# EAGLE board kdZDUCCsPW (EAGLE 6.1)
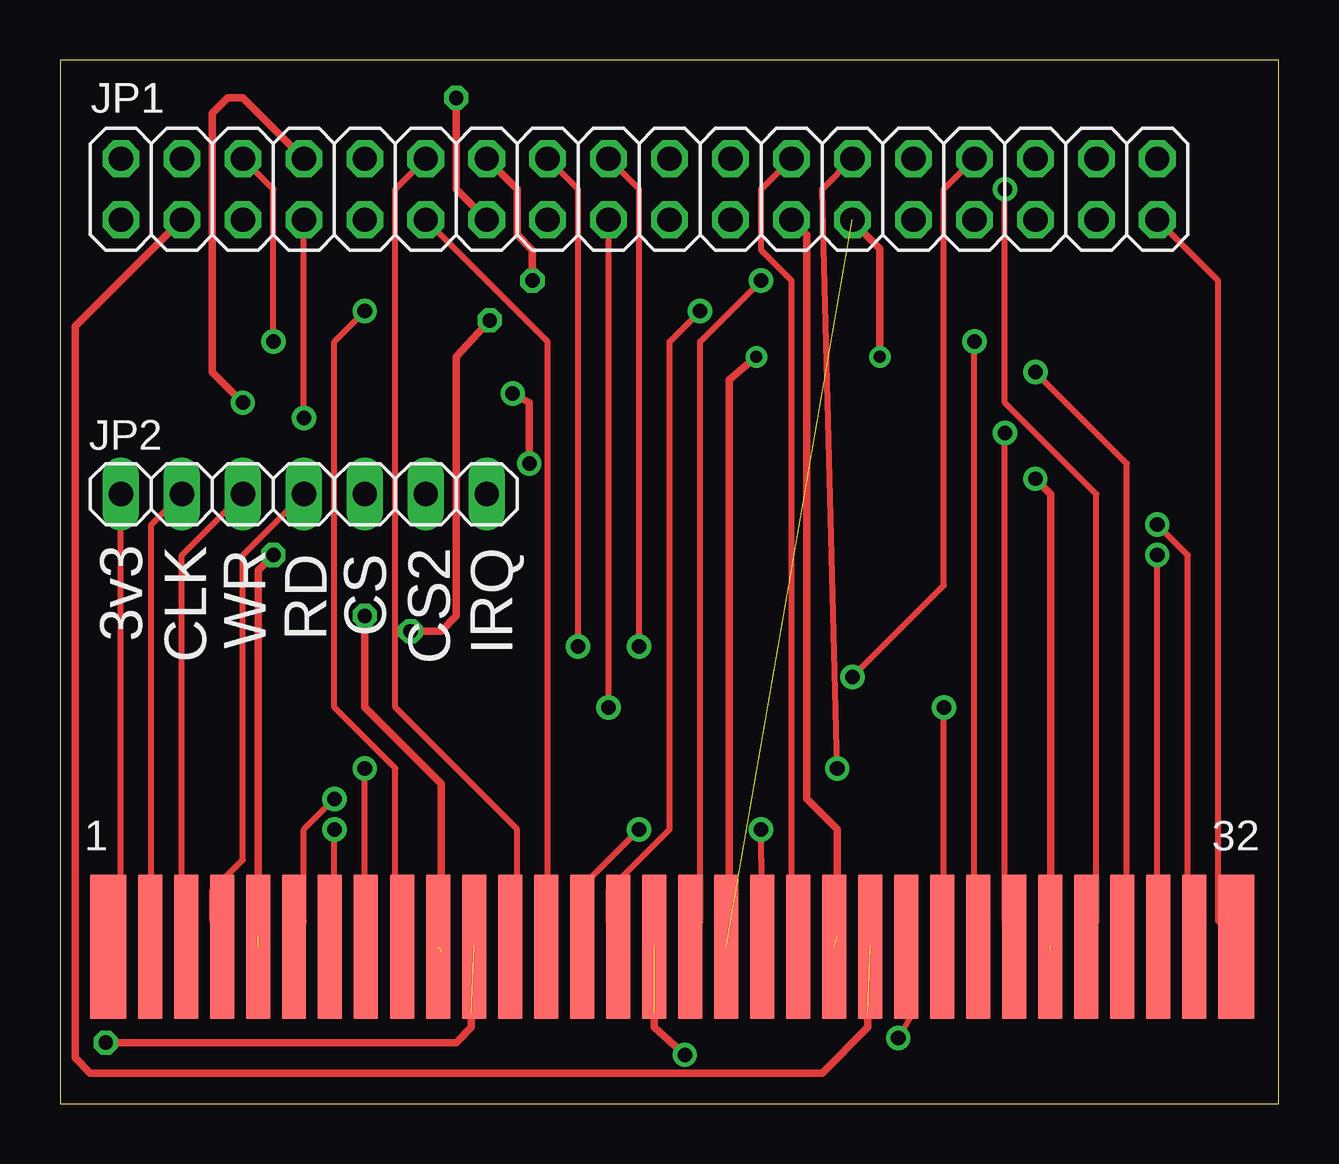
[diagram p0: board, top side]
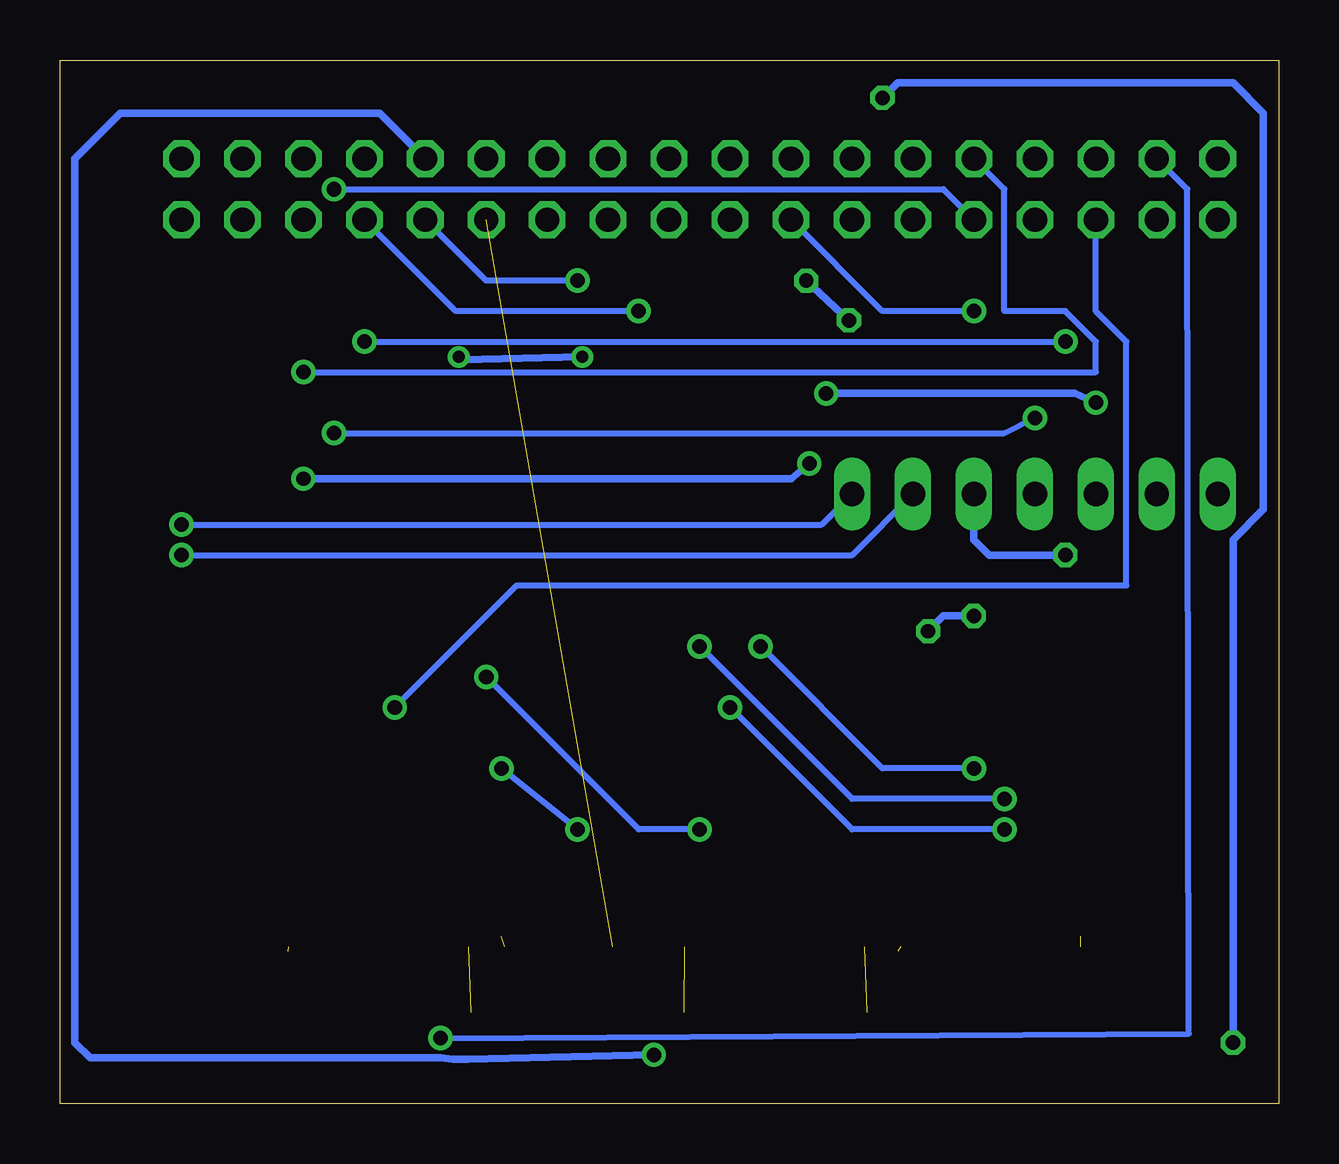
[diagram p1: board, bottom side, seen from below]

Size 50.78 x 43.48 mm. Coordinates in mm from the lower left corner, seen from the top.
Outline: 0,0 50.78,0 50.78,43.48 0,43.48 0,0
Copper layers (1*16): Top 0.035mm / dielectric 1.5mm / Bottom 0.035mm
Design rules: minimum track width 10mil, minimum drill 24mil, track to track 8mil, track to pad 8mil, pad to pad 8mil, via to via 8mil, smd to smd 8mil, copper to edge 40mil, drill to drill 8mil, minimum pad ring 10mil, minimum via ring 8mil, stop-mask expansion 4mil, vias tented up to drill 0mil, thermal gap 10mil

## Footprints (pad centres in the part's own frame; a part is rotated, then mirrored left to right if it is on the bottom)
2X18 = drill 1.016 octagon: 1 -21.59,-1.27; 2 -21.59,1.27; 3 -19.05,-1.27; 4 -19.05,1.27; 5 -16.51,-1.27; 6 -16.51,1.27; 7 -13.97,-1.27; 8 -13.97,1.27; 9 -11.43,-1.27; 10 -11.43,1.27; 11 -8.89,-1.27; 12 -8.89,1.27; 13 -6.35,-1.27; 14 -6.35,1.27; 15 -3.81,-1.27; 16 -3.81,1.27; 17 -1.27,-1.27; 18 -1.27,1.27; 19 1.27,-1.27; 20 1.27,1.27; 21 3.81,-1.27; 22 3.81,1.27; 23 6.35,-1.27; 24 6.35,1.27; 25 8.89,-1.27; 26 8.89,1.27; 27 11.43,-1.27; 28 11.43,1.27; 29 13.97,-1.27; 30 13.97,1.27; 31 16.51,-1.27; 32 16.51,1.27; 33 19.05,-1.27; 34 19.05,1.27; 35 21.59,-1.27; 36 21.59,1.27
1X07 = drill 1.016 long: 1 -7.62,0; 2 -5.08,0; 3 -2.54,0; 4 0,0; 5 2.54,0; 6 5.08,0; 7 7.62,0
GBCART = smd 1.5 x 6: 1 -23.4,-25.21; 32 23.6,-25.21 | smd 1 x 6: 2 -21.65,-25.21; 3 -20.15,-25.21; 4 -18.65,-25.21; 5 -17.15,-25.21; 6 -15.65,-25.21; 7 -14.15,-25.21; 8 -12.65,-25.21; 9 -11.15,-25.21; 10 -9.65,-25.21; 11 -8.15,-25.21; 12 -6.65,-25.21; 13 -5.15,-25.21; 14 -3.65,-25.21; 15 -2.15,-25.21; 16 -0.65,-25.21; 17 0.85,-25.21; 18 2.35,-25.21; 19 3.85,-25.21; 20 5.35,-25.21; 21 6.85,-25.21; 22 8.35,-25.21; 23 9.85,-25.21; 24 11.35,-25.21; 25 12.85,-25.21; 26 14.35,-25.21; 27 15.85,-25.21; 28 17.35,-25.21; 29 18.85,-25.21; 30 20.35,-25.21; 31 21.85,-25.21

## Placement (x,y rotation side)
JP1  [2X18]  24.13,38.1 0 top
JP2  [1X07]  10.16,25.4 0 top
U$1  [GBCART]  25.4,31.75 0 top

## Library data of the parts
JP1 JP2 = pinhead
U$1 = gameboy-nohole-noboard

## Nets
N$1: JP1.18 U$1.6
N$2: JP1.17 U$1.7
N$3: JP1.16 U$1.8
N$4: JP1.15 U$1.9
N$5: JP1.8 U$1.27
N$6: JP1.25 U$1.18
N$7: JP1.12 U$1.12
N$8: JP1.11 U$1.13
N$9: JP1.30 U$1.14
N$10: JP1.29 U$1.15
N$12: JP1.27 U$1.17
N$13: JP1.26 U$1.19
N$14: JP1.24 U$1.20
N$16: JP1.14 U$1.10
N$17: JP1.35 U$1.32
N$18: JP2.1 U$1.1
N$19: JP2.2 U$1.2
N$20: JP2.3 U$1.3
N$21: JP2.4 U$1.4
N$23: JP2.6 U$1.30
N$24: JP2.7 U$1.31
N$26: JP1.4 U$1.23
N$27: JP1.5 U$1.24
N$28: JP1.6 U$1.25
N$29: JP1.7 U$1.26
N$31: JP1.9 U$1.28
N$32: JP1.10 U$1.29
N$33: JP1.13 U$1.11
N$34: JP1.3 U$1.22
N$35: JP1.23 U$1.21
N$36: JP2.5 U$1.5
N$37: JP1.28 U$1.16

## Tracks (layer width: path | path; a pad name or v marks a point on that pad's centre or on a via)
N$1  (via drill 0.61)
  Top 0.254: JP1.18 24.13,38.1 v24.13,19.05 | v11.43,12.7 10.16,11.43 10.16,7.62 U$1.6
  Bottom 0.254: v24.13,19.05 17.78,12.7 v11.43,12.7
N$2  (via drill 0.61)
  Top 0.254: v22.86,16.51 JP1.17 | v11.43,11.43 11.43,7.62 U$1.7
  Bottom 0.254: v22.86,16.51 17.78,11.43 v11.43,11.43
N$3  (via drill 0.61)
  Top 0.254: JP1.16 21.59,38.1 v21.59,19.05 | v12.7,13.97 12.7,7.62 U$1.8
  Bottom 0.254: v21.59,19.05 16.51,13.97 v12.7,13.97
N$4  (via drill 0.61)
  Top 0.254: v12.7,33.02 11.43,31.75 11.43,16.51 13.97,13.97 13.97,7.62 U$1.9
  Bottom 0.254: JP1.15 16.51,33.02 v12.7,33.02
N$5  (via drill 0.6 pad 0.03)  (1 unrouted)
  Top 0.305: 41.27,6.35 41.27,25.4 v40.64,26.04 | v19.56,26.67 19.56,29.21 v18.86,29.59 | v7.62,29.21 6.35,30.48 6.35,41.27 6.99,41.91 7.62,41.91 JP1.8
  Bottom 0.305: v40.64,26.04 20.32,26.04 v19.56,26.67 | v18.86,29.59 8.51,29.59 v7.62,29.21
N$6  (1 unrouted)
N$7
  Top 0.254: JP1.12 13.97,38.1 13.97,16.51 19.05,11.43 19.05,7.62 U$1.12
N$8
  Top 0.254: JP1.11 20.32,31.75 20.32,7.62 U$1.13
N$9  (via drill 0.61)
  Top 0.254: JP1.30 36.83,38.1 36.83,21.59 v33.02,17.78 | v24.13,11.43 21.59,8.89 21.59,7.62 U$1.14
  Bottom 0.254: v33.02,17.78 26.67,11.43 v24.13,11.43
N$10  (via drill 0.61)
  Top 0.254: v26.67,33.02 25.4,31.75 25.4,11.43 22.86,8.89 22.86,7.62 U$1.15
  Bottom 0.254: JP1.29 34.29,33.02 v26.67,33.02
N$11  (via drill 0.5)
  Top 0.305: 27.88,8.51 27.88,30.16 v29.02,31.11 | v34.16,31.11 34.16,35.62 32.96,36.83
  Bottom 0.305: v29.02,31.11 34.04,30.99 v34.16,31.11
N$12  (via drill 0.61)
  Top 0.254: v29.21,34.29 26.67,31.75 26.67,7.62 U$1.17
  Bottom 0.254: JP1.27 33.02,34.29 v29.21,34.29
N$13  (via drill 0.61)
  Top 0.254: JP1.26 31.75,38.1 v32.38,13.97 | 29.21,10.22 v29.21,11.43 | 29.21,10.22 29.21,10.16 | 29.21,10.22 U$1.19
  Bottom 0.254: v29.21,11.43 v32.38,13.97
N$14
  Top 0.254: JP1.24 29.21,38.1 29.21,35.56 30.48,34.29 30.48,7.62 U$1.20
N$16  (via drill 0.6)  (1 unrouted)
  Top 0.305: 15.88,6.35 15.88,13.34 12.7,16.51 v12.7,20.32 | v14.61,19.68 15.88,19.68 16.51,20.32 16.51,31.11 v17.91,32.64 | v19.68,34.29 19.68,35.56 19.05,36.2 19.05,38.1 JP1.14
  Bottom 0.305: v12.7,20.32 13.97,20.32 v14.61,19.68 | v17.91,32.64 v19.68,34.29
N$17
  Top 0.254: JP1.35 48.26,34.29 48.26,7.62 U$1.32
N$18
  Top 0.254: JP2.1 2.54,7.62 U$1.1
N$19
  Top 0.254: JP2.2 3.81,24.13 3.81,7.62 U$1.2
N$20
  Top 0.254: JP2.3 5.08,22.86 5.08,7.62 U$1.3
N$21
  Top 0.254: JP2.4 7.62,22.86 7.62,10.16 6.35,8.89 6.35,7.62 U$1.4
N$23  (via drill 0.61)
  Top 0.254: v45.72,22.86 45.72,7.62 U$1.30
  Bottom 0.254: JP2.6 17.78,22.86 v45.72,22.86
N$24  (via drill 0.61)
  Top 0.254: v45.72,24.13 46.99,22.86 46.99,7.62 U$1.31
  Bottom 0.254: JP2.7 19.05,24.13 v45.72,24.13
N$26  (via drill 0.61)
  Top 0.254: v34.92,2.73 35.56,3.81 35.56,6.35 U$1.23
  Bottom 0.254: JP1.4 3.81,38.1 3.75,2.92 v34.92,2.73
N$27  (via drill 0.61)
  Top 0.254: v36.83,16.51 36.83,7.62 U$1.24
  Bottom 0.254: JP1.5 7.62,33.02 6.35,31.75 6.35,21.59 31.75,21.59 v36.83,16.51
N$28  (via drill 0.61)
  Top 0.254: JP1.6 8.89,38.1 v8.89,31.75 | v38.1,31.75 38.1,7.62 U$1.25
  Bottom 0.254: v38.1,31.75 v8.89,31.75
N$29  (via drill 0.61)
  Top 0.254: v10.16,28.57 JP1.7 | v39.37,27.94 39.37,7.62 U$1.26
  Bottom 0.254: v10.16,28.57 11.43,27.94 v39.37,27.94
N$31  (via drill 0.61)
  Top 0.254: v39.37,38.1 39.37,29.21 43.18,25.4 43.18,7.62 U$1.28
  Bottom 0.254: JP1.9 13.97,38.1 v39.37,38.1
N$32  (via drill 0.61)
  Top 0.254: v40.64,30.48 44.45,26.67 44.45,7.62 U$1.29
  Bottom 0.254: JP1.10 11.43,38.1 11.43,33.02 8.89,33.02 7.62,31.75 7.62,30.48 v40.64,30.48
N$33  (via drill 0.6)  (1 unrouted)
  Top 0.305: 17.14,3.81 17.14,3.17 16.51,2.54 v1.91,2.54 | v16.51,41.91 16.51,38.1 JP1.13
  Bottom 0.305: v1.91,2.54 1.91,23.49 0.64,24.77 0.64,41.27 1.91,42.55 15.88,42.55 v16.51,41.91
N$34  (1 unrouted)
  Top 0.305: 33.66,3.81 33.66,3.17 31.75,1.27 1.27,1.27 0.64,1.91 0.64,32.38 JP1.3
N$35  (1 unrouted)
  Top 0.305: 32.38,6.99 32.38,11.43 31.11,12.7 31.11,36.2 JP1.23
N$36  (via drill 0.6)  (1 unrouted)
  Top 0.305: 8.26,6.99 8.26,22.22 v8.89,22.86
  Bottom 0.305: v8.89,22.86 12.06,22.86 12.7,23.49 JP2.5
N$37  (via drill 0.6 pad 0.03)  (1 unrouted)
  Top 0.305: 24.77,3.81 24.77,3.17 v26.04,2.03
  Bottom 0.305: v26.04,2.03 33.78,1.84 34.42,1.84 34.92,1.91 49.53,1.91 50.16,2.54 50.16,39.37 48.26,41.27 37.47,41.27 JP1.28

## Text on the board
tNames: 3v3 | CLK | WR | CS2 | IRQ | RD | CS